# Altium PCB CW308T_STM32F415.PcbDoc
Units mil, origin at the board's own origin, x right, y up, seen from the top; angles counter-clockwise.
Board outline 2060 x 2540 mil, 2 copper layers (Top Layer, Bottom Layer); 21 components, 35 nets, 176 pads, 92 vias.
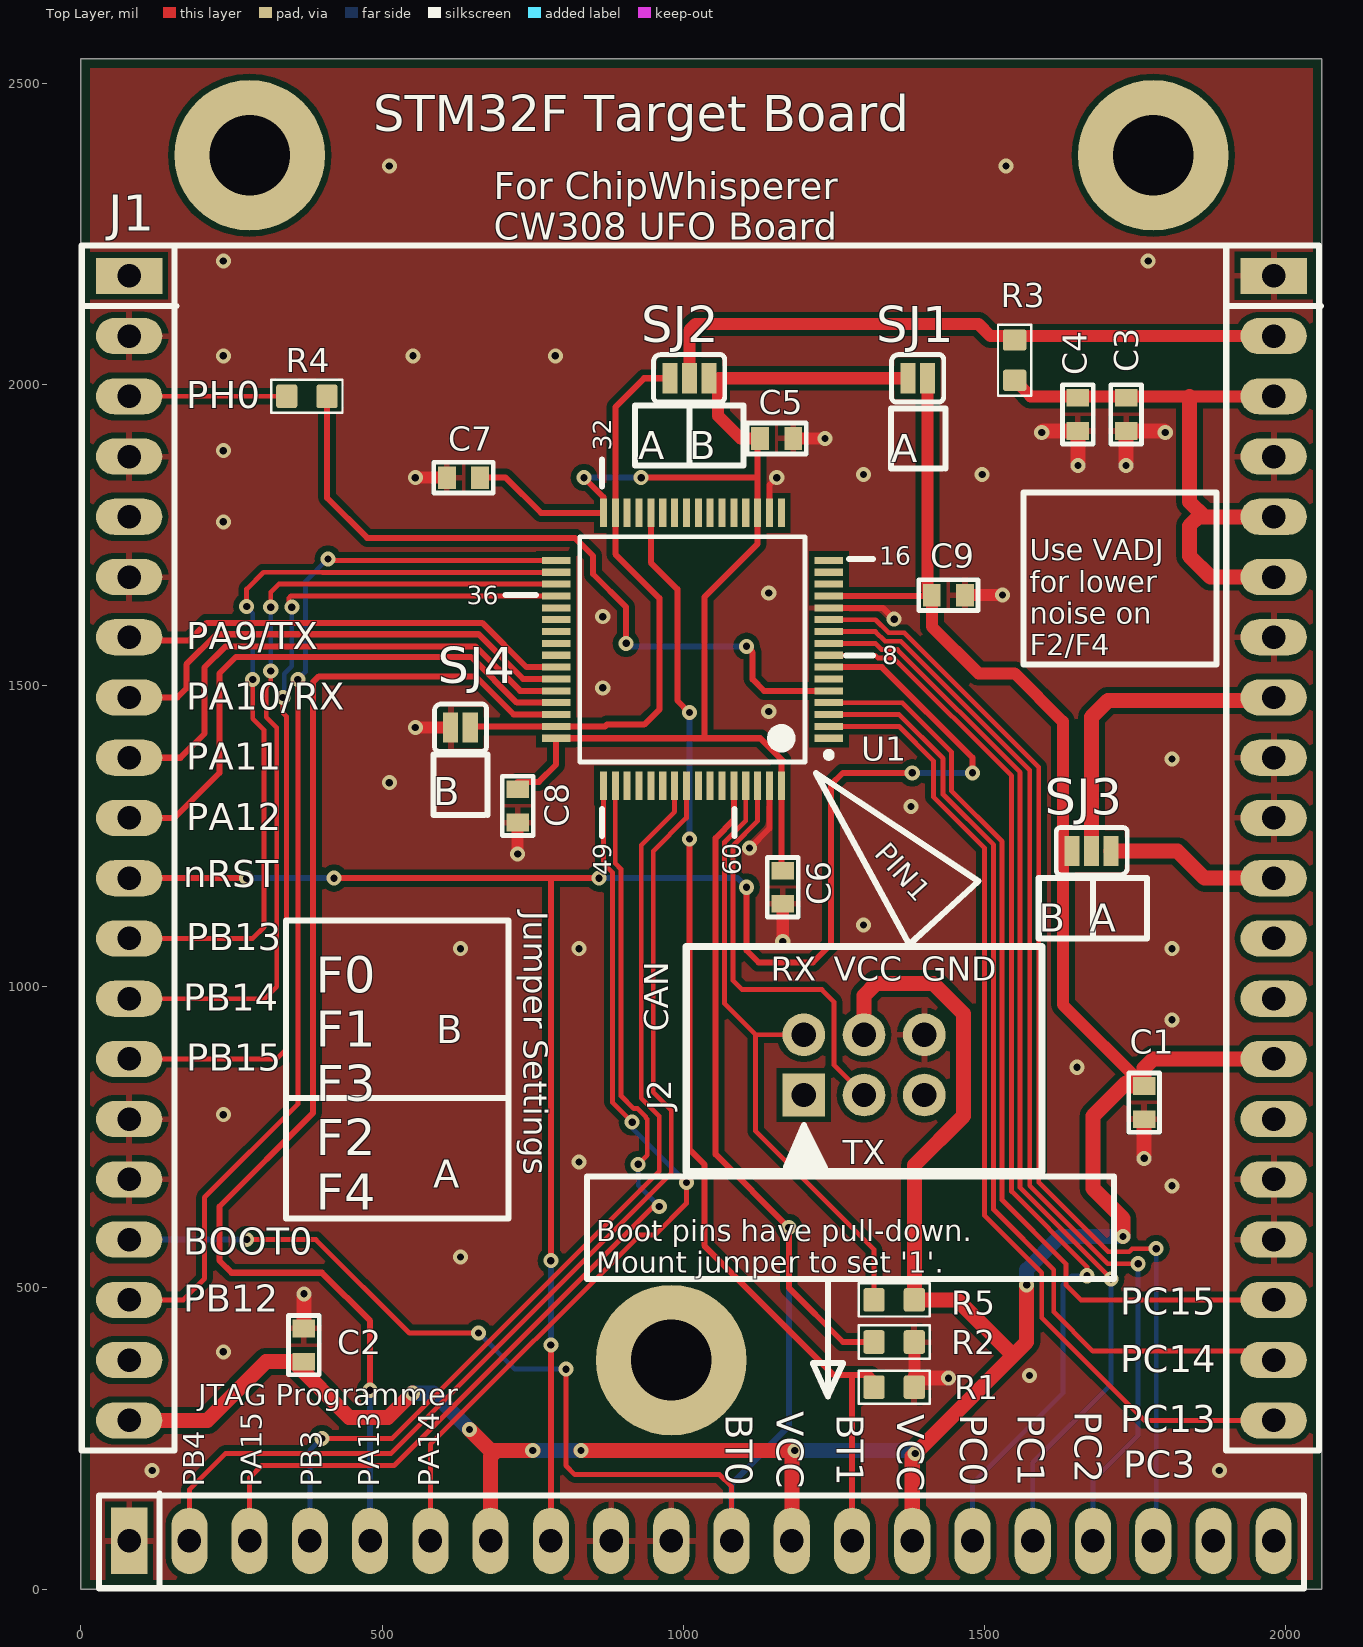
[diagram p0: Top Layer view]
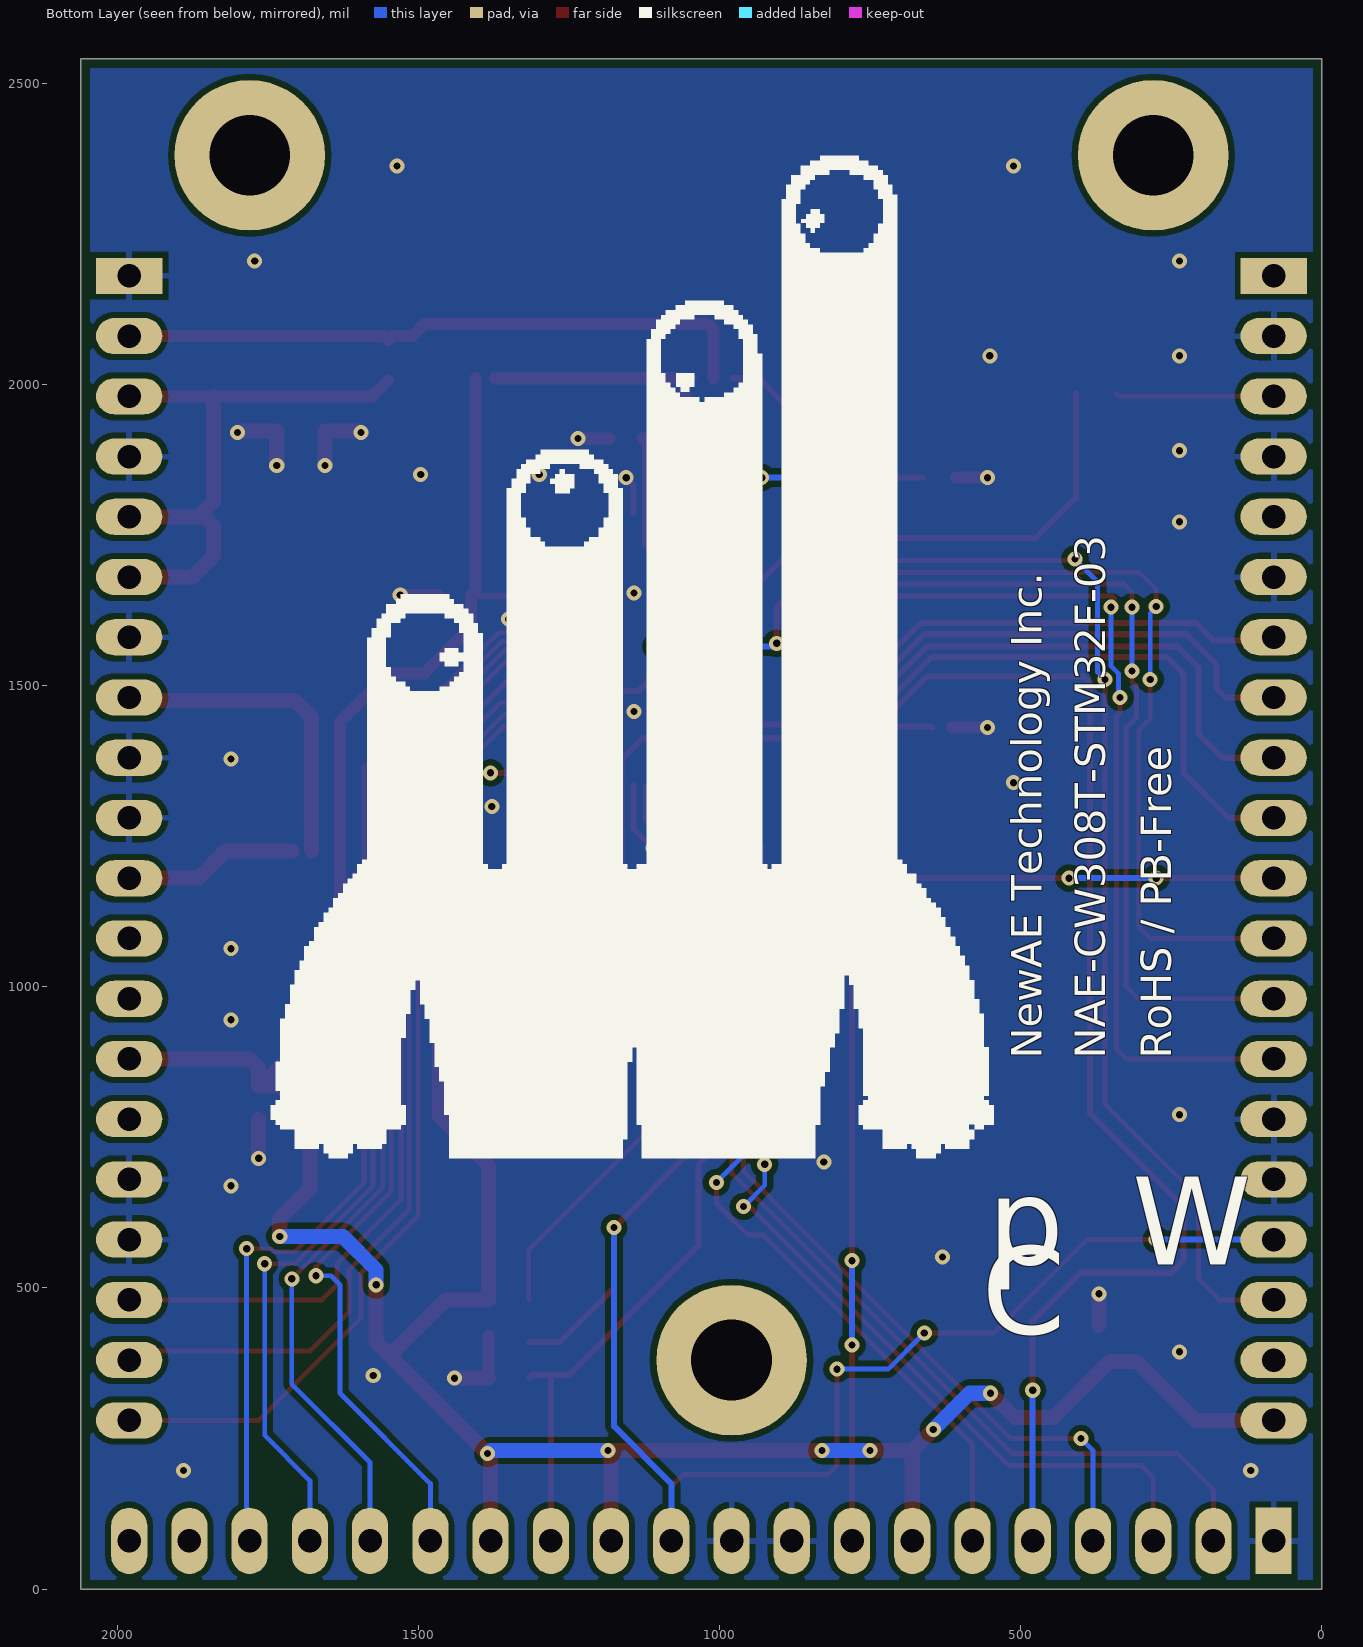
[diagram p1: Bottom Layer view, seen from below]

## Layer stack, top to bottom
Top Solder: solder mask 0.4, Solder Resist, Dk 3.5
Top Layer: signal copper 1.4
Dielectric 1: dielectric 12.6, FR-4, Dk 4.8
Bottom Layer: signal copper 1.4
Bottom Solder: solder mask 0.4, Solder Resist, Dk 3.5

## Board outline
0,0 2060,0 2060,2540 0,2540

## Design rules (kind name [scope] priority, off if disabled: settings)
BoardOutlineClearance [All] p1: gap=15 ignorepadtopadclearanceinfootprint=FALSE except(0: Arc-SplitContinuation Track-SplitContinuation SMDPad-SplitContinuation THPad-SplitContinuation Via-SplitContinuation Fill-SplitContinuation Poly-SplitContinuation Region-SplitContinuation Text-SplitContinuation)
Clearance Clearance_1 [InPolygon] p1: gap=10 ignorepadtopadclearanceinfootprint=FALSE
Clearance [All] p2: gap=6 ignorepadtopadclearanceinfootprint=FALSE except(0: Arc-Hole Track-Hole SMDPad-Hole THPad-Hole Via-Hole Fill-Hole Poly-Hole Region-Hole Text-Hole)
HoleSize [All] p1: absolutevalues=TRUE maxlimit=200 minlimit=1 maxpercent=80.000 minpercent=20.000
MinimumSolderMaskSliver [All] p1: minsoldermaskwidth=5
PasteMaskExpansion PasteMaskExpansion_SJ [InComponent('SJ2')] p1: expansion=-200 // Disable SJ shorts
PasteMaskExpansion PasteMaskExpansion_TQFP [InComponent('U1')] p2: expansion=-1.5
PasteMaskExpansion [All] p3: expansion=0
PlaneConnect PlaneConnect_viaDirect [IsVia] p1: planeconnectstyle=Direct reliefexpansion=20 reliefentries=4 reliefconductorwidth=10 reliefairgap=10
PlaneConnect [All] p2: planeconnectstyle=Relief reliefexpansion=20 reliefentries=4 reliefconductorwidth=10 reliefairgap=10
PolygonConnect PolygonConnect_viaDirect [All vs isVia] p1: connectstyle=Direct reliefconductorwidth=10 reliefentries=4 polygonreliefangle="90 Angle" airgapwidth=10
PolygonConnect [All] p2: connectstyle=Relief reliefconductorwidth=10 reliefentries=4 polygonreliefangle="90 Angle" airgapwidth=10
RoutingVias [All] p1: holewidth=12 width=25 viastyle="Through Hole" minholewidth=12 minwidth=25 maxholewidth=28 maxwidth=50
SilkToSilkClearance [All] p1: silktosilkclearance=5
SilkToSolderMaskClearance [IsPad] p1: minsilkscreentomaskgap=5 clearancetoexposedcopper=TRUE
SolderMaskExpansion [All] p1: expansion=4
Width [All] p1: maxlimit=100 minlimit=6 preferedwidth=8 minimp=50.000000 maximp=50.000000 favimp=50.000000
24 further rules are at their usual default settings.

## Components (designator, comment, footprint, x,y, rotation, side; value= is the part's Value field where it differs from the comment)
C1 "100n" CAPC0603_M 1765,807.44 r270 top
C2 "100n" CAPC0603_M 370,405 r90 top
C3 "2u2" CAPC0603_M 1735,1950 r270 top
C4 "100n" CAPC0603_M 1655,1950 r270 top
C5 "100n" CAPC0603_M 1155,1910 r0 top
C6 "100n" CAPC0603_M 1165,1165 r270 top
C7 "100n" CAPC0603_M 635,1845 r180 top
C8 "100n" CAPC0603_M 725,1300 r270 top
C9 "100n" CAPC0603_M 1440,1650 r0 top
J1 "CW308_TARGETCON" CW308_TBOARD_CONN 80,2180 r0 top locked
J2 "HDR" HDR_6PIN_2ROW_SHROUD 1300,870 r90 top
R1 "10k" RESC1608X55N 1350,335 r0 top
R2 "10k" RESC1608X55N 1350,410 r0 top
R3 "10R" RESC1608X55N 1550,2040 r270 top
R4 "100R" RESC1608X55N 375,1980 r180 top
R5 "10k" RESC1608X55N 1350,480 r0 top
SJ1 "NO" SJ_2S_NO 1388.78,2010 r0 top
SJ2 "NC" SJ_3S_NO 1010,2010 r0 top
SJ3 "NC" SJ_3S_NO 1677.57,1225 r180 top
SJ4 "NO" SJ_2S_NO 630,1430 r0 top
U1 "STM32F415RGT6" STM-LQFP64_V 1015,1560 r180 top

## Footprints (in the part's own frame and the unit in brackets; to place one, negate y for a bottom-side part, rotate by r counter-clockwise, add the part's x,y. Pads: shape width x height; smd on the part's side, far side on the other; paste and mask are expansions set on the pad)
CAPC0603_M [mm]
  rect 0.75x0.95 smd: 1(-0.7,0) 2(0.7,0)
  silkscreen extent -1.25,-0.65 1.25,0.65, body extent -0.85,-0.45 0.85,0.45, height 0.9
CW308_TBOARD_CONN [mil]
  rect 110x60 hole 39: A1(0,0) C1(1900,0)
  oval 110x60 hole 39: A2(0,-100) A3(0,-200) A4(0,-300) A5(0,-400) A6(0,-500) A7(0,-600) A8(0,-700) A9(0,-800) A10(0,-900) A11(0,-1000) A12(0,-1100) A13(0,-1200) A14(0,-1300) A15(0,-1400) A16(0,-1500) A17(0,-1600) A18(0,-1700) A19(0,-1800) A20(0,-1900) C2(1900,-100) C3(1900,-200) C4(1900,-300) C5(1900,-400) C6(1900,-500) C7(1900,-600) C8(1900,-700) C9(1900,-800) C10(1900,-900) C11(1900,-1000) C12(1900,-1100) C13(1900,-1200) C14(1900,-1300) C15(1900,-1400) C16(1900,-1500) C17(1900,-1600) C18(1900,-1700) C19(1900,-1800) C20(1900,-1900)
  rect 60x110 hole 39: B1(0,-2100)
  oval 60x110 hole 39: B2(100,-2100) B3(200,-2100) B4(300,-2100) B5(400,-2100) B6(500,-2100) B7(600,-2100) B8(700,-2100) B9(800,-2100) B10(900,-2100) B11(1000,-2100) B12(1100,-2100) B13(1200,-2100) B14(1300,-2100) B15(1400,-2100) B16(1500,-2100) B17(1600,-2100) B18(1700,-2100) B19(1800,-2100) B20(1900,-2100)
  round 250 hole 134: MH1(200,200) MH2(900,-1800) MH2(1700,200)
  silkscreen extent -79,-2179 1979,50, body extent -50,-2149 1950,50, height 48
HDR_6PIN_2ROW_SHROUD [mm] "6-pin header, male, with shroud"
  rect 1.8x1.8 hole 1.02: 1(-1.27,2.54)
  round 1.8 hole 1.02: 2(1.27,2.54) 3(-1.27,0) 4(1.27,0) 5(-1.27,-2.54) 6(1.27,-2.54)
  silkscreen extent -4.5,-7.5 5,7.5, body extent -4.44,-7.41 4.83,7.42, height 9.32
RESC1608X55N [mm] "Chip Resistor, Body 1.6x0.8mm, EIA 0603, IPC Medium Density"
  round 0.254 on Mech15: 0(0,0)
  rrect25% 0.9x1 smd: 1(-0.85,0) 2(0.85,0)
  Top Layer pour cut-out: -0.6,0.5 -0.4,0.7 0.4,0.7 0.6,0.5 0.6,-0.5 0.4,-0.7 -0.4,-0.7 -0.6,-0.5
  silkscreen extent -1.5,-0.7 1.5,0.7, body extent -0.87,-0.47 0.88,0.48, height 0.54
SJ_2S_NO [mil] "Solder Jumper, open (no paste)"
  rect 25x50 smd paste-393.7: 1(-16.22,0) 2(16.22,0)
  silkscreen extent -43,-39 43,39
SJ_3S_NO [mil] "3-Way Solder Jumper,  no pads"
  rect 25x50 smd paste-787.4: 1(-32.43,0) 2(0,0)
  rect 25x50 smd paste-393.7: 3(32.44,0)
  silkscreen extent -60,-39 59,39
STM-LQFP64_V [mm] "Thin QFP, 64-Leads, Body 10x10mm, Pitch 0.5mm, ST Recommended"
  rect 1.2x0.3 smd: 1(-5.75,3.75) 2(-5.75,3.25) 3(-5.75,2.75) 4(-5.75,2.25) 5(-5.75,1.75) 6(-5.75,1.25) 7(-5.75,0.75) 8(-5.75,0.25) 9(-5.75,-0.25) 10(-5.75,-0.75) 11(-5.75,-1.25) 12(-5.75,-1.75) 13(-5.75,-2.25) 14(-5.75,-2.75) 15(-5.75,-3.25) 16(-5.75,-3.75) 33(5.75,-3.75) 34(5.75,-3.25) 35(5.75,-2.75) 36(5.75,-2.25) 37(5.75,-1.75) 38(5.75,-1.25) 39(5.75,-0.75) 40(5.75,-0.25) 41(5.75,0.25) 42(5.75,0.75) 43(5.75,1.25) 44(5.75,1.75) 45(5.75,2.25) 46(5.75,2.75) 47(5.75,3.25) 48(5.75,3.75)
  rect 0.3x1.2 smd: 17(-3.75,-5.75) 18(-3.25,-5.75) 19(-2.75,-5.75) 20(-2.25,-5.75) 21(-1.75,-5.75) 22(-1.25,-5.75) 23(-0.75,-5.75) 24(-0.25,-5.75) 25(0.25,-5.75) 26(0.75,-5.75) 27(1.25,-5.75) 28(1.75,-5.75) 29(2.25,-5.75) 30(2.75,-5.75) 31(3.25,-5.75) 32(3.75,-5.75) 49(3.75,5.75) 50(3.25,5.75) 51(2.75,5.75) 52(2.25,5.75) 53(1.75,5.75) 54(1.25,5.75) 55(0.75,5.75) 56(0.25,5.75) 57(-0.25,5.75) 58(-0.75,5.75) 59(-1.25,5.75) 60(-1.75,5.75) 61(-2.25,5.75) 62(-2.75,5.75) 63(-3.25,5.75) 64(-3.75,5.75)
  silkscreen extent -5.87,-4.75 4.75,4.75, body extent -5,-5 5,5, height 1.6

## Part data
C1 C2 C4 C5 C6 C7 C8 C9: library part CCHIP-100n-0603, "100n, 0603", Case-EIA=0603, Case-Metric=1608, Component Group=Capacitor, Component Type=Standard, Mounting Technology=SMT, Part Number=CCHIP-100n-0603, Pin Count=2
C3: library part CCHIP-2u2-0603, "2u2, 0603", Case-EIA=0603, Case-Metric=1608, Component Group=Capacitor, Component Type=Standard, Mounting Technology=SMT, Part Number=CCHIP-2u2-0603, Pin Count=2
J1: library part CW308_TBOARD, "CW308 \"Standard\" Target Board Connector", Component Group=Mechanical, Component Type=Standard, Mounting Technology=Through-hole, Part Number=CW308_TBOARD, Pin Count=60, Pitch=2.54mm
J2: library part HDR_6PIN_2ROW_SHROUD, "HDR, Male, 6-Pin, 2 Row, Shrouded", Manufacture 1="FCI Connectors", Manufacture Part Number 1=75869-131LF, Supplier Part Number 1=609-2845-ND, Component Group=Connector, Component Type=Standard, Mounting Technology=Through-hole, Part Number=HDR_6PIN_2ROW_SHROUD, Pin Count=6, RoHS=Yes, Supplier 1=Digi-Key
R1 R2 R5: library part RCHIP-10K-0603, "10k res, 0603, 1%, 1/10W", Case-EIA=0603, Case-Metric=1608, Manufacture 1=Yageo, Manufacture Part Number 1=RC0603FR-0710KL, Rated Power=0.1W, Rated Voltage=75VDC, Supplier Part Number 1=311-10.0KHRCT-ND, Temperature Range="-55C to 155C", Tolerance=1%, Component Group=Resistor, Component Type=Standard, Mounting Technology=SMT, Part Number=RCHIP-10K-0603, Pin Count=2, Supplier 1=Digi-Key
R3: library part RCHIP-10R-0603, "10R res, 0603, 1%, 1/10W", Case-EIA=0603, Case-Metric=1608, Manufacture 1=Yageo, Manufacture Part Number 1=RC0603FR-0710RL, Rated Power=0.1W, Rated Voltage=75VDC, Supplier Part Number 1=311-10.0HRCT-ND, Temperature Range="-55C to 155C", Tolerance=1%, Component Group=Resistor, Component Type=Standard, Mounting Technology=SMT, Part Number=RCHIP-10R-0603, Pin Count=2, Supplier 1=Digi-Key
R4: library part RCHIP-100R-0603, "100R res, 0603, 1%, 1/10W", Case-EIA=0603, Case-Metric=1608, Manufacture 1=Yageo, Manufacture Part Number 1=RC0603FR-07100RL, Rated Power=0.1W, Rated Voltage=75VDC, Supplier Part Number 1=311-100HRCT-ND, Temperature Range="-55C to 155C", Tolerance=1%, Component Group=Resistor, Component Type=Standard, Mounting Technology=SMT, Part Number=RCHIP-100R-0603, Pin Count=2, Supplier 1=Digi-Key
SJ1 SJ4: library part SJ_2S_NO, "Solder Jumper, NO", Component Group="PCB Feature", Component Type="Standard (No BOM)", Mounting Technology=COPPER, Part Number=SJ_2S_NO, Pin Count=2
SJ2 SJ3: library part SJ_3S_12JMP, "Solder Jumper, NC", Component Group="PCB Feature", Component Type="Standard (No BOM)", Mounting Technology=COPPER, Part Number=SJ_3S_12JMP, Pin Count=3
U1: library part CMP-0243-00023-3, "ARM Cortex-M4 32-bit MCU+FPU, 210 DMIPS, 1024 kB Flash, 192 kB Internal RAM, 51 I/Os, 64-pin LQFP, -40 to 85 degC, Tray", I/Os (High Current)=51, Manufacturer=STMicroelectronics, Operating Frequency(F) (Processor speed) (MHz)=168, Supply Voltage(Vcc) max (V)=3.6, Supply Voltage(Vcc) min (V)=1.8, ComponentLink1Description="Manufacturer URL", ComponentLink1URL=http://www.st.com/web/en/home.html, ComponentLink2Description=Datasheet, ComponentLink2URL=http://www.st.com/st-web-ui/static/active/en/resource/technical/document/datasheet/DM00035129.pdf, ComponentLink3Description="Package Specification", ComponentLink3URL=http://www.st.com/st-web-ui/static/active/en/resource/technical/document/datasheet/DM00037051.pdf, Core="ARM Cortex-M4", D/A Converter=2x12-bit, DatasheetVersion="Rev. 4", FLASH Size (Prog) (kB)=1024, Internal RAM Size (kB)=192, Mounting Technology="Surface Mount", PackageDescription="64-Pin Low Profile Quad Flat Package, 10 x 10 mm Body, 0.5 mm Pitch", PackageReference=LQFP64, PackageVersion="Rev. 4, 06/2013", Packing=Tray, PartId=1, PartNumber=STM32F415RGT6

## Via types
v1: diameter 25, hole 12, Top Layer to Bottom Layer, tented both sides, 92 vias

## Nets (pads, with @x,y where several pads share a name; then routed paths per layer and width w, separated by ;. In a path a pad name is that pad's centre, name@x,y a point inside that pad or via, vN(x,y) a via of type N, cw(c..) or ccw(c..) an arc to the next point about the centre after c; other vN are vias at no path point)
BOOT0: J1.A17 J1.B11 R2.1 U1.60 | length 2995.3
  Top Layer w8: v1(275,580) 390,580 545,425 v1(660,425) ; v1(805,365) 805,205 820,190 1060,190 1080,170 J1.B11
  Top Layer w10: U1.60 1083.9,1276.73 1053.5,1246.33 1053.5,721.5 v1(1175,600) 1175,500 1265,410 R2.1
  Bottom Layer w8: v1(660,425) 720,365 800,365 805,360 v1(805,365)
  Bottom Layer w10: J1.A17 v1(275,580) ; J1.B11 1080,175 1175,270 v1(1175,600)
BOOT1: J1.B13 R1.1 U1.28 | length 1900.9
  Top Layer w10: U1.28 946.1,1703.9 990,1660 990,1475 v1(1010,1455) ; v1(1010,1245) 1010,730 1035,705 1035,570 1250,355 1280,355 ; J1.B13 1280,355 ; R1.1@1316.54,350 1311.54,355 1280,355
  Bottom Layer w10: v1(1010,1245) v1(1010,1455)
CAN_RX: J2.2 R5.1 U1.61 | length 1050.9
  Top Layer w8: U1.61 1103.58,1275.2 1068.5,1240.12 1068.5,971.5 1120,920 ; J2.2 1120,920 ; R5.1 1316.54,563.46 1120,760 1120,920
CAN_TX: J2.3 U1.62 | length 698.2
  Top Layer w8: U1.62 1123.27,1275.09 1082.5,1234.32 1082.5,1010 1097.5,995 1230,995 1250,975 1250,870 J2.3
CLKI: R4.1 U1.5 | length 1218.2
  Top Layer w10: R4.1@408.46,1985 408.46,1811.54 475,1745 820,1745 850,1715 850,1685 905,1630 v1(905,1570) ; v1(1105,1565) 1115,1555 1115,1510 1133.9,1491.1 U1.5
  Bottom Layer w10: v1(905,1570) 910,1565 v1(1105,1565)
CS: J1.A18 U1.33 | length 1813.7
  Top Layer w8: J1.A18 170,480 205,515 205,650 360,805 v1(360,1510) ; v1(410,1710) 405,1710 402.64,1707.64 U1.33
  Bottom Layer w8: v1(360,1510) 372.5,1522.5 372.5,1672.5 v1(410,1710)
GND: C1.2 C2.2 C3.2 C4.2 C5.2 C6.2 C7.2 C8.2 C9.2 J1.A2 J1.A4 J1.A6 J1.A15 J1.A16 J1.B1 J1.B9 J1.B10 J1.C1 J1.C4 J1.C7 J1.C9 J1.C10 J1.C16 J1.C17 J2.6 R1.2 R2.2 SJ4.1 U1.12 U1.18 U1.63 | length 1124.1
  Top Layer w10: v1(1110,1230) 1142.95,1262.95 U1.63 ; U1.18 1142.95,1832.95 v1(1155,1845) ; U1.12 1331.1,1628.9 v1(1350,1610)
  Top Layer w20: v1(555,1430) SJ4.1 ; v1(555,1845) C7.2 ; v1(725,1220) C8.2 ; v1(1165,1075) C6.2 ; C5.2 v1(1235,1910) ; R1.2@1383.46,350 R2.2@1383.46,420 ; C9.2 v1(1530,1650)
  Top Layer w25: C2.2@370,437.56 v1(370,490) ; R1.2@1383.46,350 v1(1440,350) ; v1(1595,1920) 1597.44,1922.44 C4.2 v1(1655,1865) ; v1(1735,1865) C3.2 1797.56,1922.44 v1(1800,1920) ; v1(1765,715) C1.2
  other v1: 118.11,196.85 1889.76,196.85 1574.8,354.33 236.22,393.7 629.92,551.18 1811.02,669.29 826.77,708.66 236.22,787.4 1653.54,866.14 1811.02,944.88 629.92,1062.99 826.77,1062.99 1811.02,1062.99 1299.21,1102.36 1377.95,1299.21 511.81,1338.58 1811.02,1377.95 1141.73,1456.69 866.14,1496.06 866.14,1614.17 1141.73,1653.54 236.22,1771.65 1299.21,1850.39 1496.06,1850.39 236.22,1889.76 236.22,2047.24 551.18,2047.24 787.4,2047.24 236.22,2204.72 1771.65,2204.72 511.81,2362.2 1535.43,2362.2
GPIO3: J1.A9 U1.44 | length 880.3
  Top Layer w10: J1.A9 165,1380 205,1420 205,1530 240,1565 655,1565 728.9,1491.1 U1.44
GPIO4: J1.A10 U1.45 | length 947.5
  Top Layer w10: J1.A10 155,1280 230,1355 230,1520 257.34,1547.34 647.66,1547.34 723.58,1471.42 U1.45
LED1: J1.C18 U1.4 | length 1556.4
  Top Layer w8: U1.4 1363.58,1471.42 1445,1390 1445,1325 1529,1241 1529,646 1635,540 1635,505 1660,480 J1.C18
LED2: J1.C19 U1.3 | length 1613.1
  Top Layer w8: U1.3 1358.27,1451.73 1431,1379 1431,1319.2 1515,1235.2 1515,630 1615,530 1615,460 1680,395 1965,395 J1.C19
LED3: J1.C20 U1.2 | length 1652.2
  Top Layer w8: U1.2 1357.95,1432.05 1415,1375 1415,1315 1500,1230 1500,620 1595,525 1595,450 1765,280 J1.C20
MISO: J1.A13 U1.35 | length 1401.9
  Top Layer w8: J1.A13 305,980 325,1000 325,1430 307.5,1447.5 307.5,1500 310,1500 315,1505 315,1518.84 v1@312.5,1521.34 ; v1(315,1630) 315,1655 328.27,1668.27 U1.35
  Bottom Layer w8: v1(315,1523.84) 315,1620 320,1625 v1(315,1630)
MOSI: J1.A14 U1.36 | length 1472.5
  Top Layer w8: J1.A14 325,880 341,896 341,1449 335,1455 v1(335,1480) ; v1(350,1630) 345,1635 345,1645 348.58,1648.58 U1.36
  Bottom Layer w8: v1(335,1480) 337.5,1482.5 337.5,1519.32 350,1531.82 v1(350,1630)
NetC3_1: C3.1 C4.1 J1.C3 J1.C5 J1.C6 R3.2 | length 1002.1
  Top Layer w20: R3.2 1576.54,1980 1840,1980 J1.C3
  Top Layer w25: 1840,1980 1840,1805 1865,1780 ; J1.C6 1875,1680 1840,1715 1840,1765 1855,1780 1865,1780 ; J1.C5 1865,1780
NetC5_1: C5.1 C6.1 C7.1 C8.1 SJ1.1 SJ2.3 U1.19 U1.32 U1.48 U1.64 | length 2298.9
  Top Layer w10: C7.1 705,1845 763.62,1786.38 U1.32 867.36,1812.64 v1(835,1845) ; C8.1@725,1340 760,1340 788.62,1368.62 U1.48 1035,1412.36 ; v1(930,1845) 1123.27,1845 ; SJ2.3 1057.44,2010 ; C5.1 1123.27,1905.83 1123.27,1845 ; C6.1 1162.64,1194.92 U1.64 1162.64,1372.64 1165,1375 1127.64,1412.36 1035,1412.36 ; 1035,1412.36 1035,1646.73 1123.27,1735 U1.19 1123.27,1845
  Top Layer w20: C5.1 1095,1910 1057.44,1947.56 1057.44,2010 SJ1.1
  Bottom Layer w10: v1(835,1845) v1(930,1845)
NetJ1_A3: J1.A3 R4.2 | length 263.6
  Top Layer w8: J1.A3 336.54,1980 R4.2@341.54,1985
NetJ1_C2: J1.C2 R3.1 SJ2.2 | length 1067.8
  Top Layer w20: SJ2.2 1010,2090 1020,2100 1490,2100 1510,2080 1543.46,2080 R3.1 1556.54,2080 J1.C2
NetJ1_C8: J1.C8 SJ3.2 | length 538.4
  Top Layer w25: SJ3.2 1677.57,1447.57 1705,1475 1975,1475 J1.C8
NetJ1_C11: J1.C11 SJ3.1 | length 288.6
  Top Layer w25: SJ3.1 1820,1225 1865,1180 J1.C11
NetSJ2_1: SJ2.1 SJ4.2 U1.31 U1.47 | length 968.9
  Top Layer w10: SJ4.2 648.26,1432.05 U1.47 870,1432.05 872.95,1435 935,1435 960,1460 960,1645 887.05,1717.95 U1.31 887.05,1962.05 935,2010 SJ2.1
nRST: J1.A11 J1.B8 U1.7 | length 3231.2
  Top Layer w10: J1.A11 v1(275,1180) ; v1(420,1180) 780,1180 ; J1.B8 v1(780,405) ; v1(780,545) 780,1180 ; v1(860,1180) 780,1180 ; v1(1105,1165) 1105,1060 1125,1040 1215,1040 1245,1070 1245,1335 1265,1355 v1(1380,1355) ; U1.7 1329.53,1530.47 1480,1380 v1(1480,1355)
  Bottom Layer w10: v1(275,1180) v1(420,1180) ; v1(780,405) v1(780,545) ; v1(860,1180) 1090,1180 v1(1105,1165) ; v1(1380,1355) v1(1480,1355)
PC0: J1.B15 U1.8 | length 1801.7
  Top Layer w8: U1.8 1318.63,1550.16 1323.28,1545.5 1349.5,1545.5 1545,1350 1545,660 1670,535 v1(1670,520)
  Bottom Layer w8: J1.B15 1480,175 1630,325 1630,505 1645,520 v1(1670,520)
PC1: J1.B16 U1.9 | length 1798.5
  Top Layer w8: U1.9 1318.74,1569.84 1329.08,1559.5 1355.3,1559.5 1559,1355.8 1559,666 v1(1710,515)
  Bottom Layer w8: J1.B16 1580,210 1710,340 v1(1710,515)
PC2: J1.B17 U1.10 | length 1843.5
  Top Layer w8: U1.10 1318.85,1589.53 1334.88,1573.5 1361.1,1573.5 1575,1359.6 1575,669.8 1704.8,540 v1(1755,540)
  Bottom Layer w8: J1.B17 1680,180 1755,255 v1(1755,540)
PC3: J1.B18 U1.11 | length 1871.2
  Top Layer w8: U1.11 1318.97,1609.21 1340.68,1587.5 1366.9,1587.5 1590,1364.4 1590,675 1705,560 1740,560 1745,565 v1(1785,565)
  Bottom Layer w8: J1.B18 1785,85 v1(1785,565)
RX: J1.A8 U1.43 | length 806.3
  Top Layer w10: J1.A8 160,1480 175,1495 175,1535 225,1585 660,1585 734.21,1510.79 U1.43
SCK: J1.A12 U1.34 | length 1330.5
  Top Layer w8: J1.A12 285,1080 304,1099 304,1426 285,1445 v1(285,1510) ; v1(275,1631) 275,1660 302.95,1687.95 400.23,1687.95 400.68,1687.5 788.17,1687.5 U1.34
  Bottom Layer w8: v1(275,1631) 275,1630 285,1620 v1(285,1510)
TCK: J1.B6 U1.49 | length 1501.3
  Top Layer w8: J1.B6 580,240 927.5,587.5 952.5,587.5 1005,640 v1(1005,675) ; U1.49 867.36,1204.46 882.5,1189.32 882.5,807.5 v1(915,775)
  Bottom Layer w8: v1(915,775) 915,765 v1(1005,675)
TDI: J1.B3 U1.50 | length 1732.9
  Top Layer w8: J1.B3 280,185 300,205 520,205 957.5,642.5 965,635 v1(960,635) ; U1.50 887.05,1204.57 896.5,1195.12 896.5,818.5 917.5,797.5 924.32,797.5 937.5,784.32 937.5,782.5 940,780 940,720 v1(925,705)
  Bottom Layer w8: v1(925,705) 925,670 v1(960,635)
TDO: J1.B4 U1.55 | length 1597.7
  Top Layer w8: v1(400,250) 516.82,250 960,693.18 960,785 930,815 930,1235 985.47,1290.47 U1.55
  Bottom Layer w8: J1.B4 380,230 v1(400,250)
TMS: J1.B5 U1.46 | length 2114.6
  Top Layer w10: v1(480,330) 480,445 400,525 250,525 230,545 230,635 385,790 385,1505 395,1515 655,1515 718.27,1451.73 U1.46
  Bottom Layer w10: J1.B5 v1(480,330)
TRST: J1.B2 U1.56 | length 1781.4
  Top Layer w8: J1.B2 180,165 240,225 515,225 980,690 980,795 950,825 950,1225 1005.16,1280.16 U1.56
TX: J1.A7 U1.42 | length 753.2
  Top Layer w10: J1.A7 85,1575 180,1575 209,1604 666,1604 739.53,1530.47 U1.42
VCC: C1.1 C2.1 C9.1 J1.A20 J1.B7 J1.B12 J1.B14 J1.C14 J2.4 R5.2 SJ1.2 SJ3.3 U1.13 | length 5602.1
  Top Layer w10: U1.13 1411.02,1648.58 C9.1
  Top Layer w20: SJ1.2 1405,1657.44 C9.1 1412.44,1597.56 1490,1520 1550,1520 1630,1440 1630,970 C1.1
  Top Layer w25: J1.A20 210,280 307.44,377.44 352.56,377.44 445,285 510,285 v1(550,325) ; v1(645,265) 680,230 v1(750,230) 690,230 680,220 J1.B7 ; v1(830,230) v1(1185,230) 1180,225 J1.B12 ; J2.4 1300,985 1320,1005 1415,1005 1465,955 1465,785 1383.46,703.46 R5.2 1455,480 1547.5,387.5 ; J1.B14 1380,220 v1(1385,225) 1547.5,387.5 ; v1(1570,505) 1570,410 1547.5,387.5 ; v1(1730,585) 1730,615 1680,665 1680,785 1735,840 1740,835 C1.1 1765,865 1780,880 J1.C14
  Bottom Layer w25: v1(550,325) 585,325 v1(645,265) ; v1(750,230) v1(830,230) ; v1(1185,230) 1380,230 v1(1385,225) ; v1(1570,505) 1570,530 1625,585 v1(1730,585)
pads on no net: J1.A1 J1.A5 J1.A19 J1.B19 J1.B20 J1.C12 J1.C13 J1.C15 J1.MH1 J1.MH2 J2.1 J2.5 R1.0 R2.0 R3.0 R4.0 R5.0 U1.1 U1.6 U1.14 U1.15 U1.16 U1.17 U1.20 U1.21 U1.22 U1.23 U1.24 U1.25 U1.26 U1.27 U1.29 U1.30 U1.37 U1.38 U1.39 U1.40 U1.41 U1.51 U1.52 U1.53 U1.54 U1.57 U1.58 U1.59

## Polygon pours and split planes (outlines as drawn)
GND on Bottom Layer "GNDBOT" (solid, remove dead copper, pour order 0): -35,2580 -75,2540 -75,-70 2095,-70 2175,10 2175,2675
GND on Top Layer "Top Layer-GND" (solid, remove dead copper, pour order 2): -30,2660 -10,2640 2100,2640 2100,-25 2120,-45 2100,-65 -50,-65

## Silkscreen, mask and mechanical layers (free items; w line width, h text height)
Top Overlay:
  lines w10: 155,2230 1901.26,2230 ; 340,815 710,815 ; 670,1285 585,1285 585,1385 675,1385 675,1285 ; 705,1650 755,1650 ; 865,1250 865,1295 ; 865,1830 865,1875 ; 1010,1865 1010,1965 ; 1085,1250 1085,1295 ; 1205,730 1195,710 1210,715 1205,740 1182,705 1215,710 1200,770 ; 1240,515 1240,320 ; 1270,1550 1315,1550 ; 1275,1710 1315,1710 ; 1430,1860 1345,1860 1345,1960 1435,1960 1435,1860 ; 1680,1080 1680,1180 ; 1200,770 1200,750 1180,700 1225,705 1200,770 ; 1200,770 1235,700 1170,700 1200,770 ; 1240,320 1215,375 1265,375 1240,320 ; 340,615 710,615 710,1110 340,1110 340,615 ; 840,515 1715,515 1715,685 840,685 840,515 ; 920,1865 920,1965 1100,1965 1100,1865 920,1865 ; 1220,1355 1490,1175 1375,1070 1220,1355 ; 1565,1535 1885,1535 1885,1820 1565,1820 1565,1535 ; 1590,1080 1770,1080 1770,1180 1590,1180 1590,1080
  text "STM32F Target Board" at 485,2420 h60
  text "For ChipWhisperer / CW308 UFO Board" at 685,2240 h45
  text "PH0" at 175,1960 h45
  text "32" at 880,1890 h30 r90
  text "A" at 925,1860 h80
  text "B" at 1010,1860 h80
  text "A" at 1345,1855 h80
  text "16" at 1325,1700 h30
  text "36" at 640,1635 h30
  text "PA9/TX" at 175,1560 h45
  text "Use VADJ / for lower / noise on / F2/F4" at 1575,1550 h35
  text "8" at 1330,1535 h30
  text "PA10/RX" at 175,1460 h45
  text "PA11" at 175,1360 h45
  text "B" at 585,1285 h80
  text "PA12" at 175,1260 h45
  text "PIN1" at 1315,1220 h35 r311.73
  text "49" at 880,1185 h30 r90
  text "60" at 1095,1185 h30 r90
  text "nRST" at 170,1165 h45
  text "Jumper Settings" at 735,1125 h40 r270
  text "B" at 1590,1075 h80
  text "A" at 1675,1075 h80
  text "PB13" at 175,1060 h45
  text "RX" at 1145,1010 h40
  text "VCC" at 1250,1010 h40
  text "GND" at 1395,1010 h40
  text "PB14" at 170,960 h45
  text "CAN" at 975,925 h40 r90
  text "B" at 590,890 h80
  text "PB15" at 175,860 h45
  text "TX" at 1265,705 h40
  text "A" at 585,650 h80
  text "F0 / F1 / F3 / F2 / F4" at 390,630 h60
  text "BOOT0" at 170,555 h45
  text "Boot pins have pull-down. / Mount jumper to set '1'." at 855,525 h35
  text "PB12" at 170,460 h45
  text "PC15" at 1725,455 h45
  text "PC14" at 1725,360 h45
  text "JTAG Programmer" at 195,305 h35
  text "VCC" at 1155,295 h45 r270
  text "PC2" at 1650,295 h45 r270
  text "BT0" at 1070,290 h45 r270
  text "BT1" at 1255,290 h45 r270
  text "VCC" at 1355,290 h45 r270
  text "PC0" at 1460,290 h45 r270
  text "PC1" at 1555,290 h45 r270
  text "PC13" at 1725,260 h45
  text "PC3" at 1730,185 h45
  text "PB4" at 205,170 h35 r90
  text "PA15" at 300,170 h35 r90
  text "PB3" at 400,170 h35 r90
  text "PA13" at 495,170 h35 r90
  text "PA14" at 595,170 h35 r90
Bottom Overlay:
  drawing of 2 lines, arcs and shapes, not listed
  text "RoHS / PB-Free" at 250,880 h50 r270
  text "NAE-CW308T-STM32F-03" at 360,880 h50 r270
  text "NewAE Technology Inc." at 465,880 h50 r270
  text "W" at 315,490 h250
  text "p" at 555,490 h250
  text "C" at 565,375 h250
Mechanical 1:
  the board outline again, w10

## Dimensions
2060,-30 to 0,-30 on Drill Drawing
-30,0 to -45,2540 on Drill Drawing
-30,0 to -45,2540 on Drill Drawing
0,-40 to 2060,-40 on Drill Drawing